# Altium PCB Bessel2.PcbDoc
Units mm, origin at the board's own origin, x right, y up, seen from the top; angles counter-clockwise.
Board outline 50.16 x 50.16 mm, 2 copper layers (Top Layer, Bottom Layer); 30 components, 19 nets, 80 pads, 0 vias.
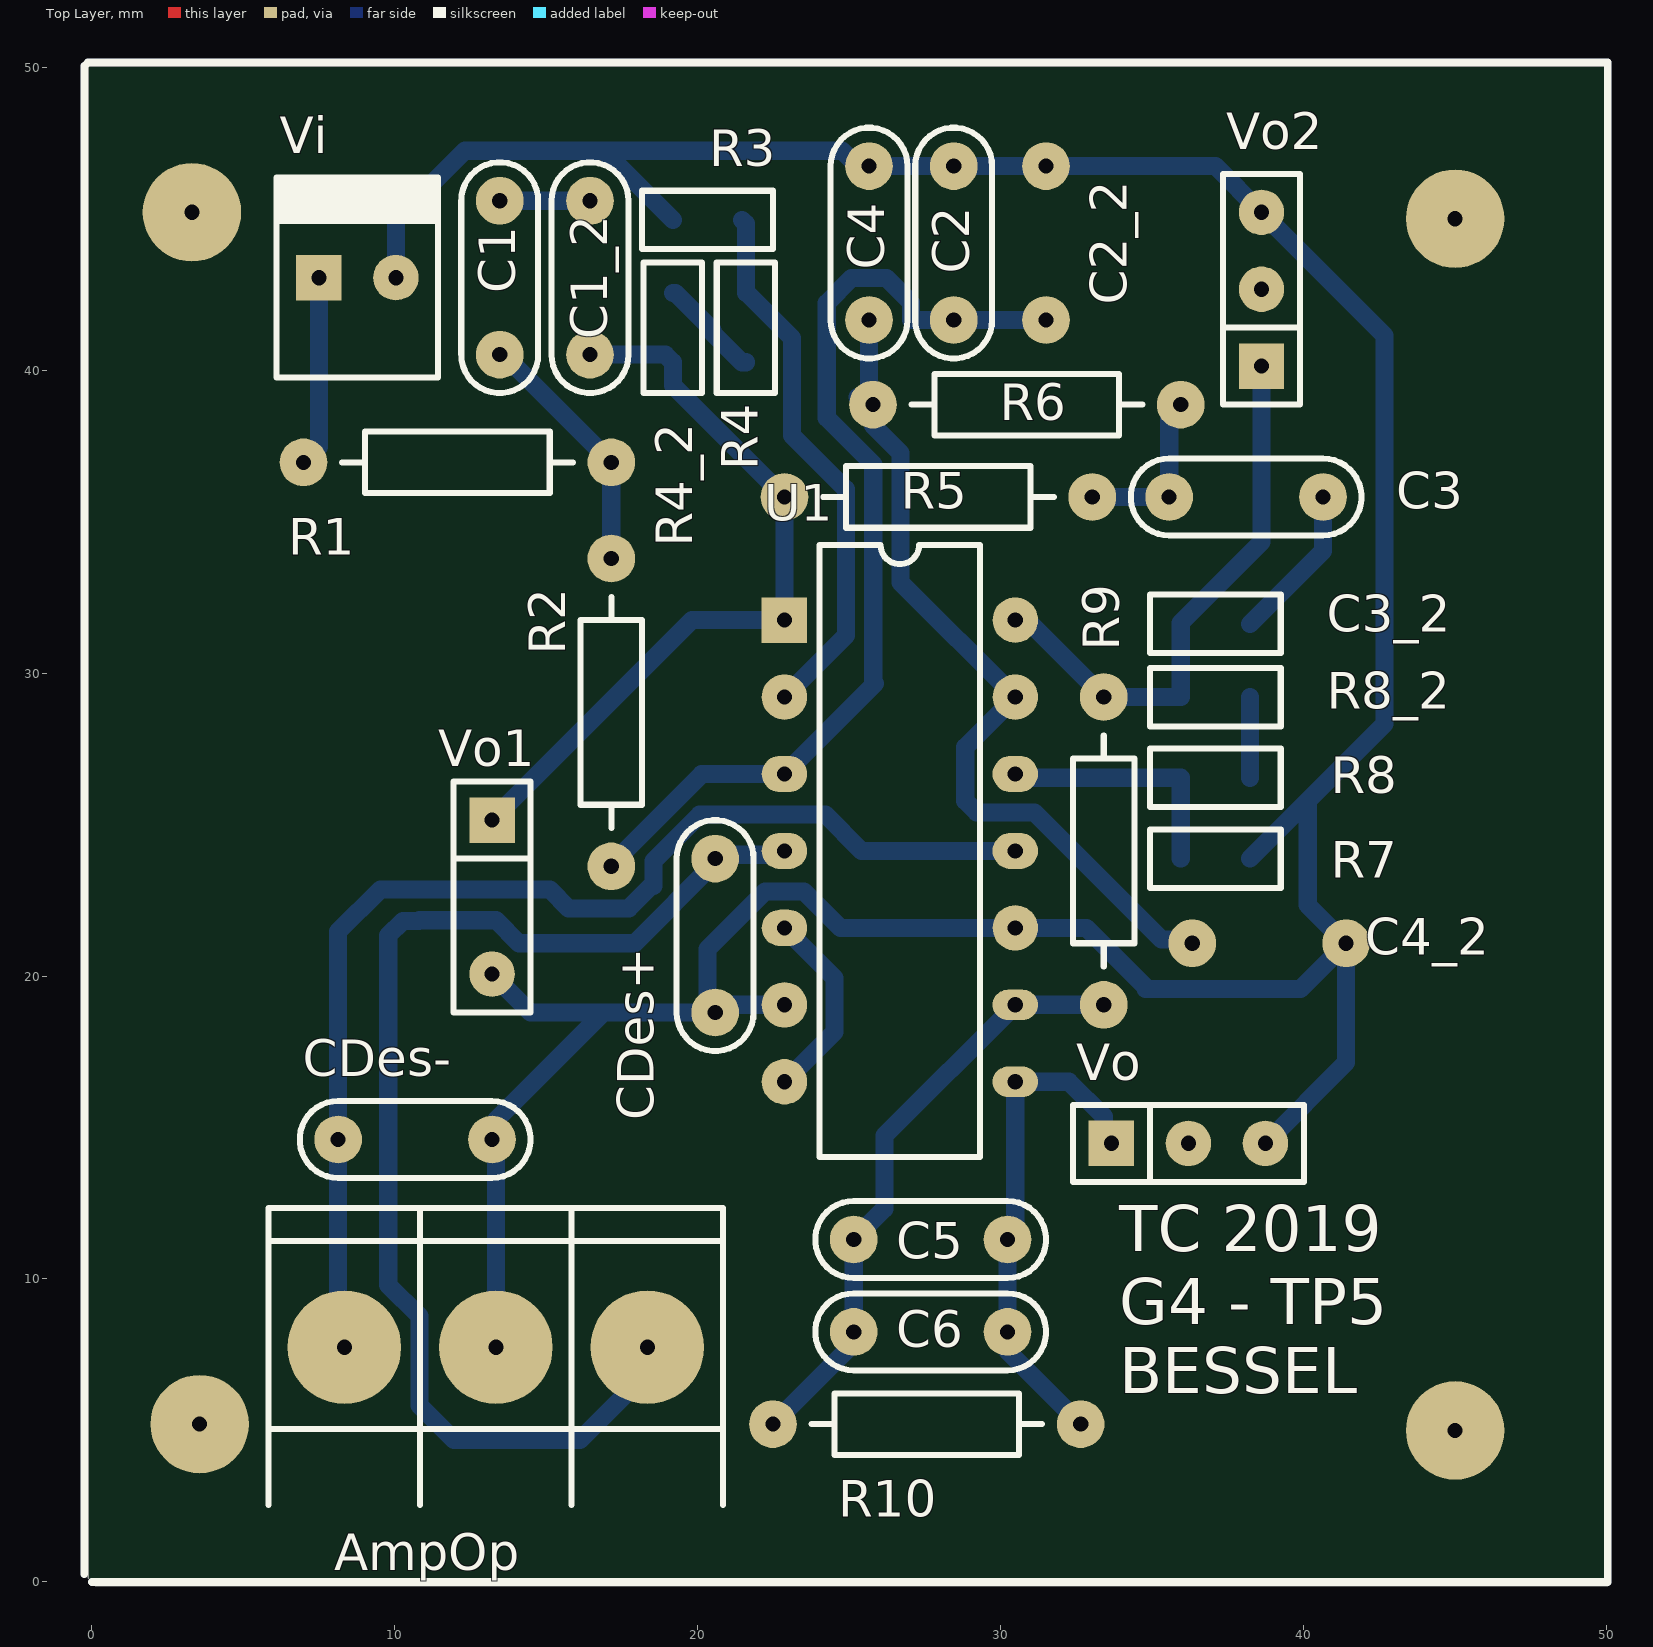
[diagram p0: Top Layer view]
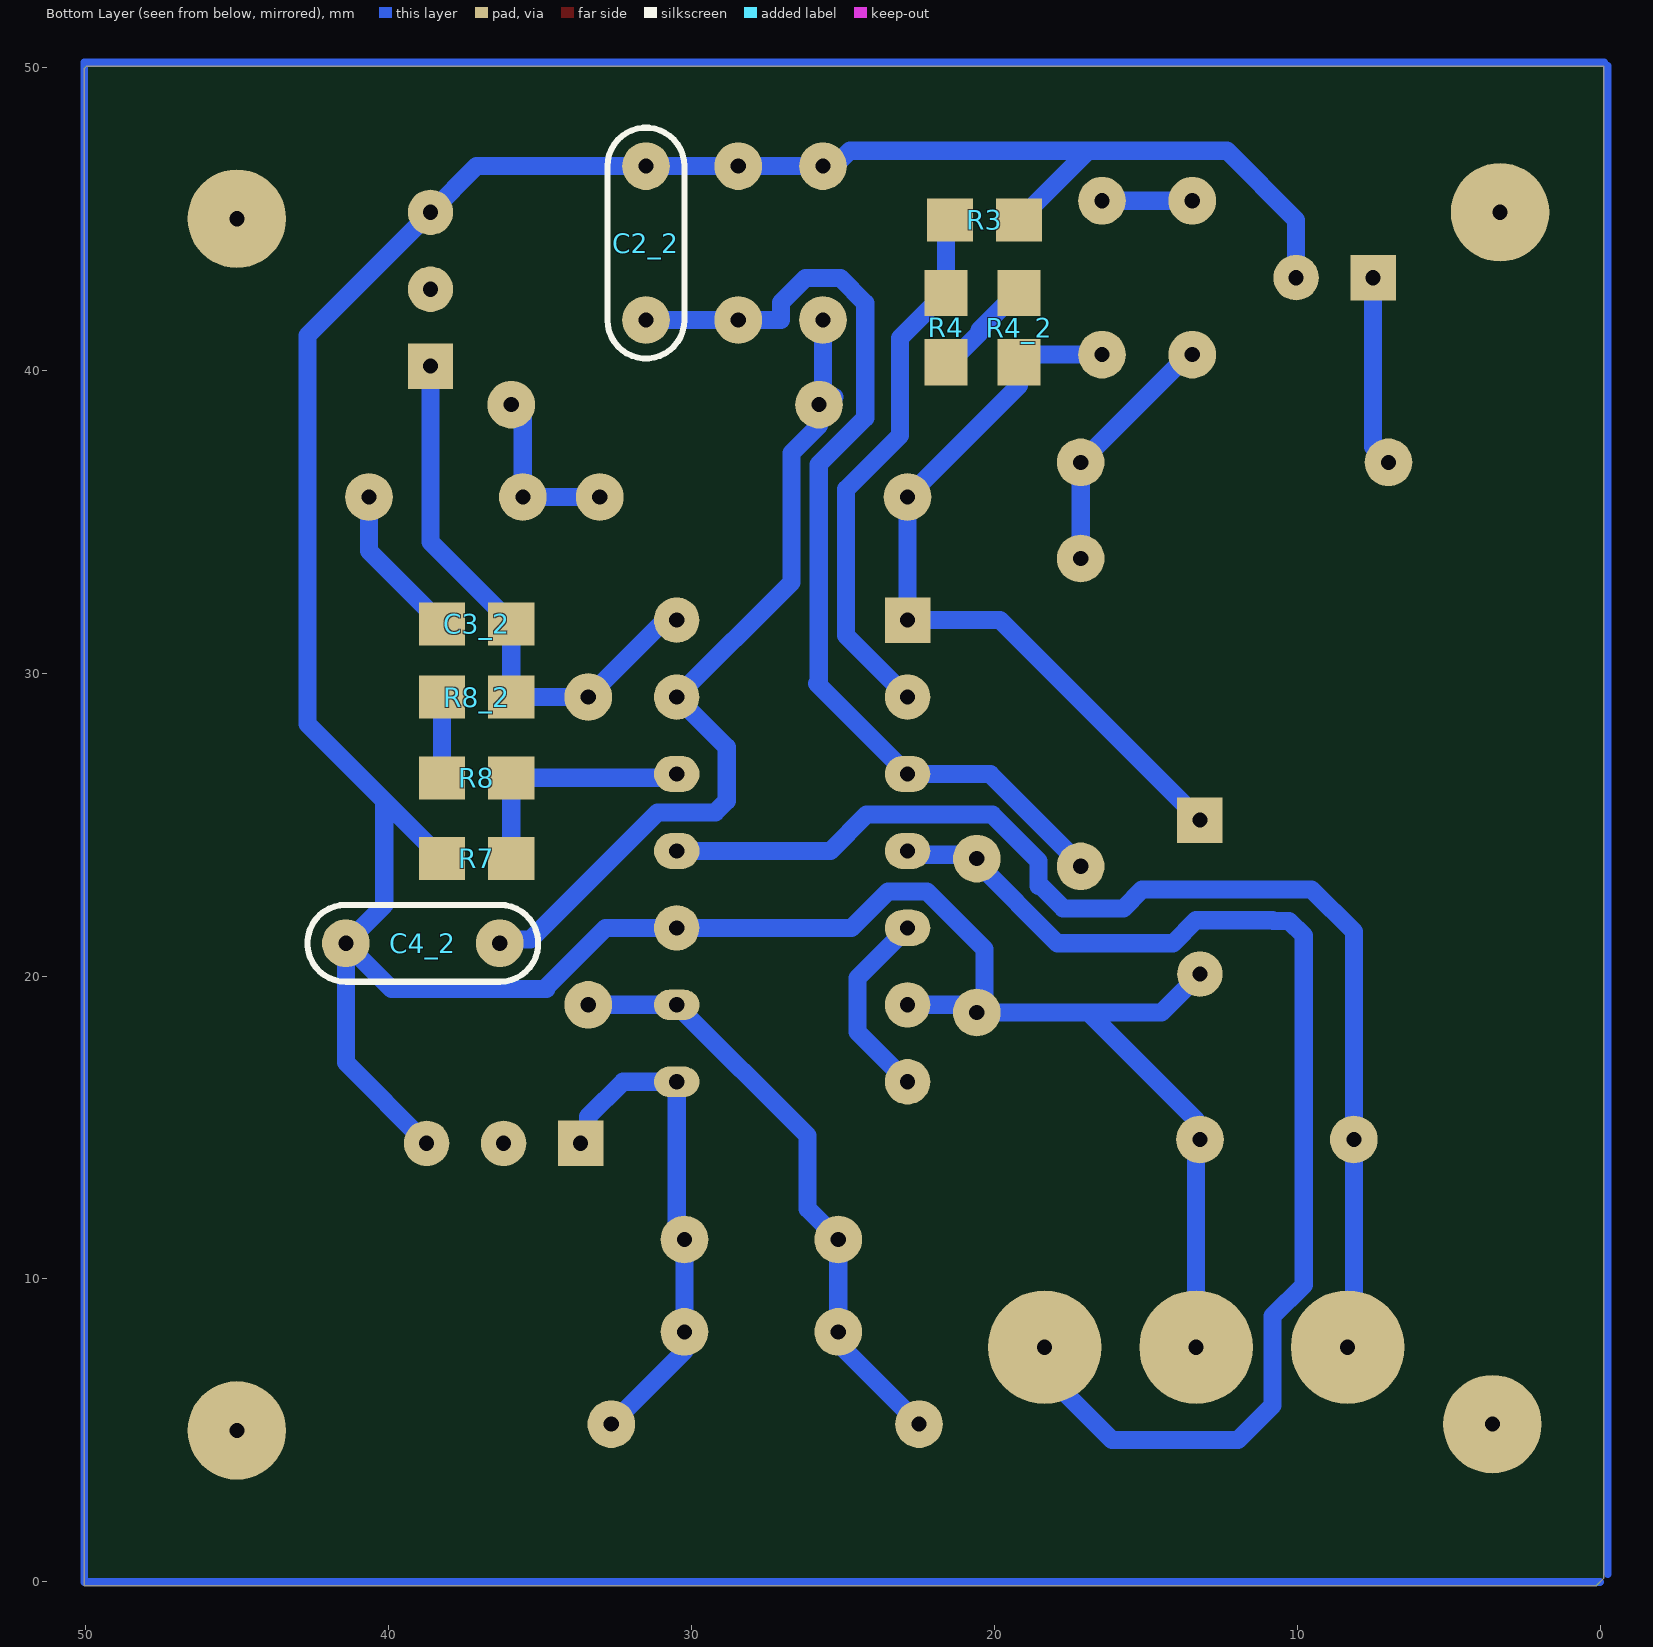
[diagram p1: Bottom Layer view, seen from below]
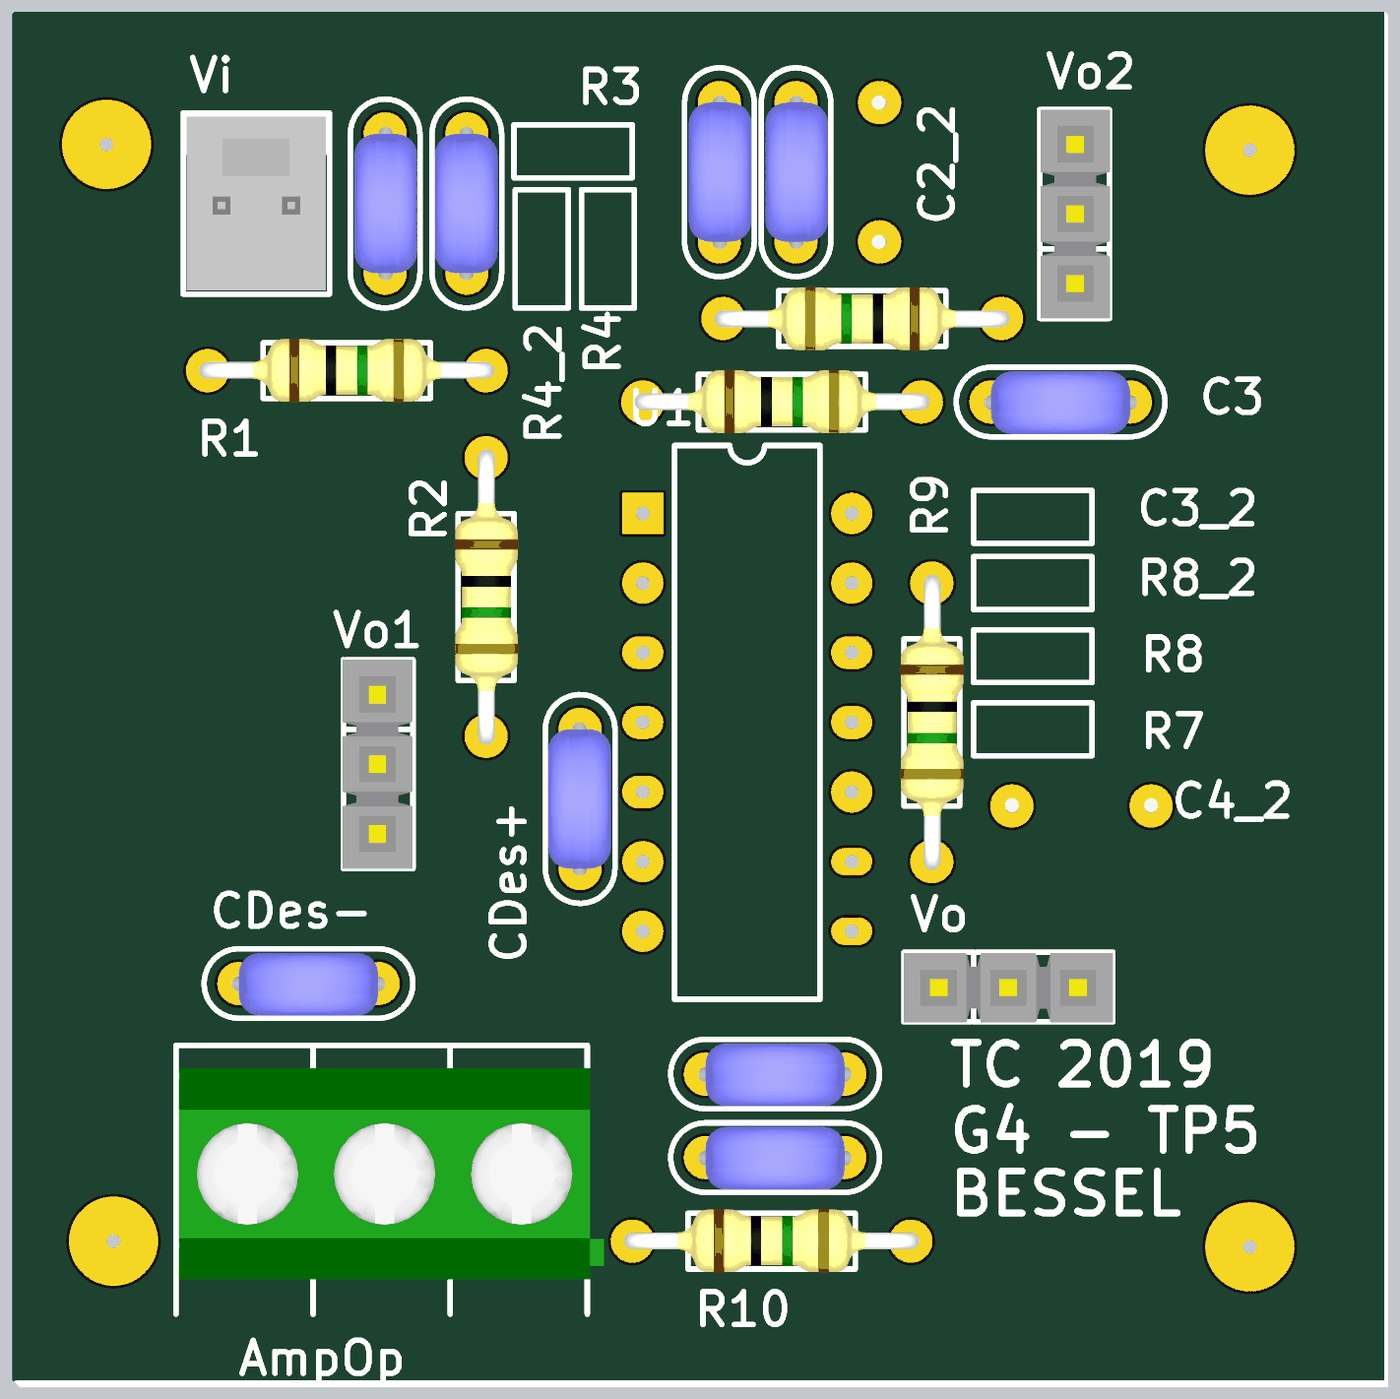
[diagram p2: 3D render of the assembled board from above, using the file's embedded part models]
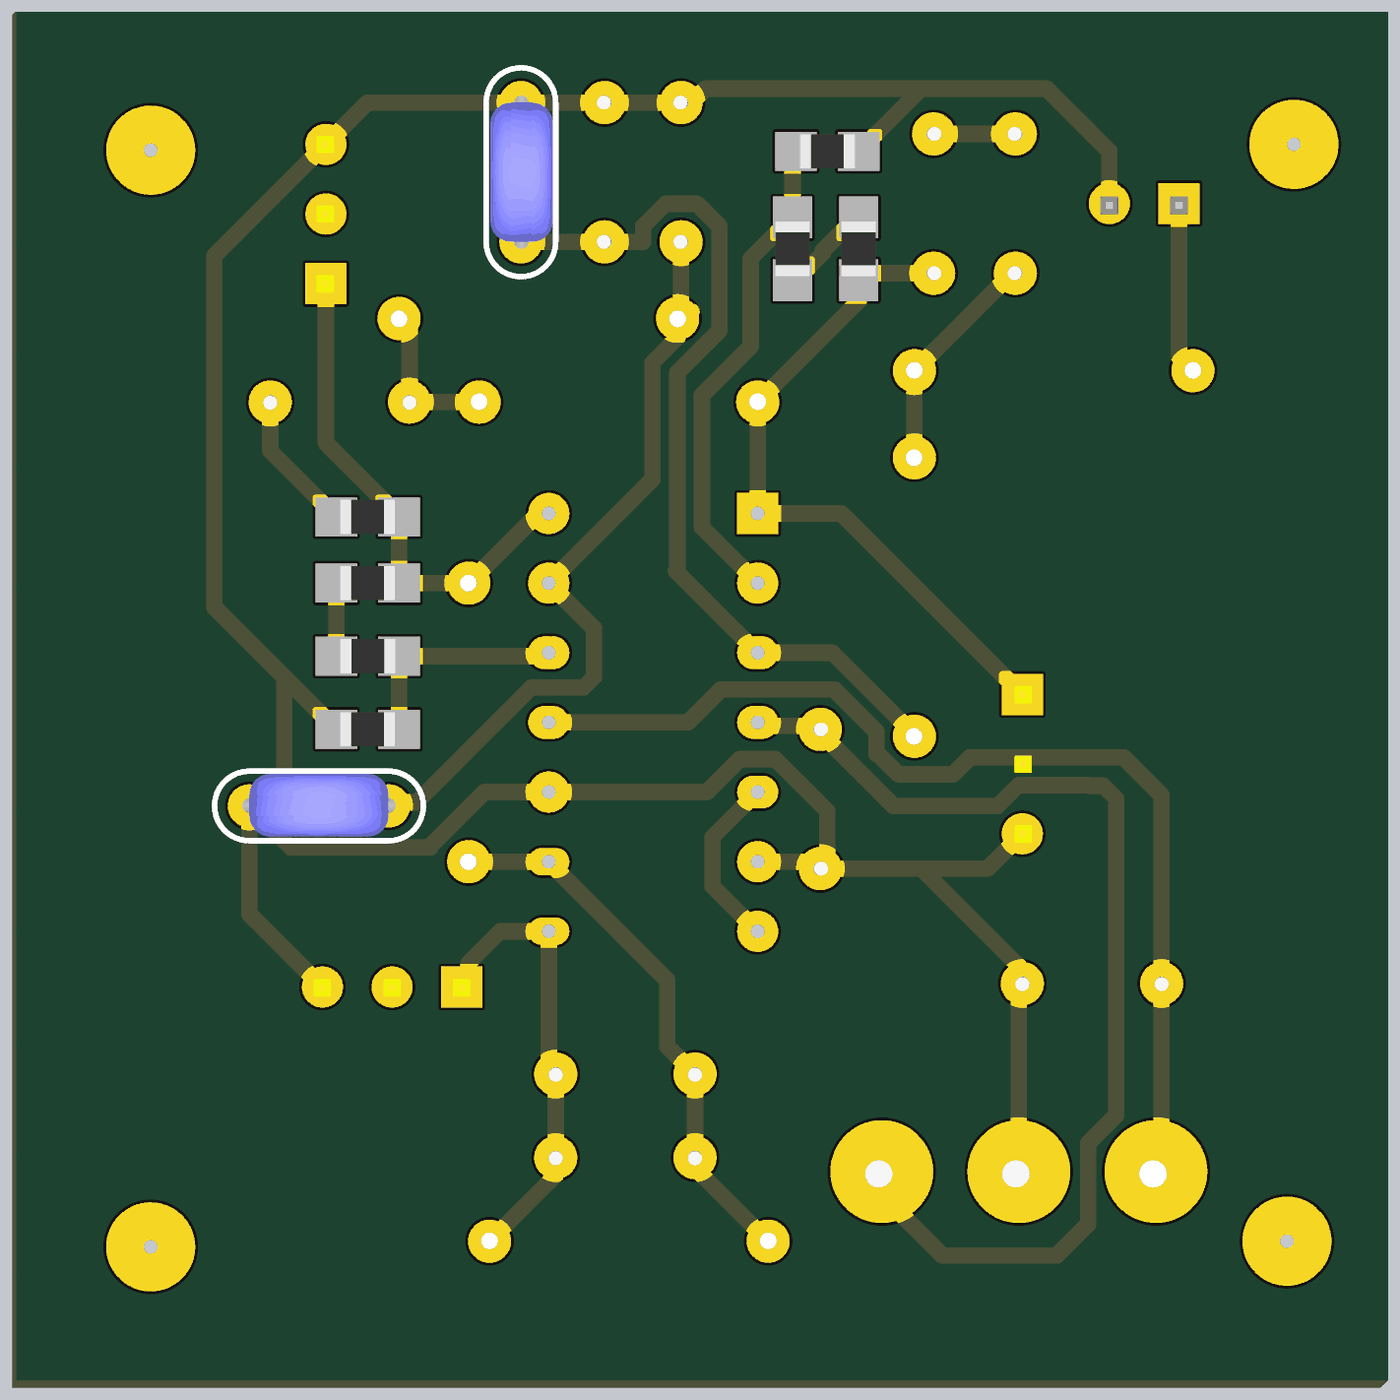
[diagram p3: 3D render of the assembled board from below, using the file's embedded part models]

## Layer stack, top to bottom
Top Solder: solder mask 0.0102, Solder Resist, Dk 3.5
Top Layer: signal copper 0.0356
Dielectric 1: dielectric 0.32, FR-4, Dk 4.8
Bottom Layer: signal copper 0.0356
Bottom Solder: solder mask 0.0102, Solder Resist, Dk 3.5

## Board outline
0.127,-0.127 50.038,-0.127 50.038,49.962 49.962,50.038 -0.127,50.038 -0.127,0.127

## Design rules (kind name [scope] priority, off if disabled: settings)
Clearance [All] p1: gap=0.3 ignorepadtopadclearanceinfootprint=FALSE
PolygonConnect [All] p1: connectstyle=Relief reliefconductorwidth=0.254 reliefentries=4 polygonreliefangle="90 Angle" airgapwidth=0.254
RoutingVias [All] p1: holewidth=0.711 width=1.27 viastyle="Through Hole" minholewidth=0.711 minwidth=1.27 maxholewidth=0.711 maxwidth=1.27
SolderMaskExpansion [All] p1: expansion=0.102
Width [All] p1: maxlimit=0.6 minlimit=0.6 preferedwidth=0.6
30 further rules are at their usual default settings.

## Components (designator, comment, footprint, x,y, rotation, side; value= is the part's Value field where it differs from the comment)
AmpOp "BORNERA 3" BORNERA3 13.335,7.747 r270 top
C1 "CAP" CAP200 13.462,43.053 r90 top
C1_2 "CAP" CAP200 16.442,43.053 r270 top
C2 "CAP" CAP200 28.448,44.196 r90 top
C2_2 "CAP" CAP200 31.496,44.196 r90 bottom
C3 "CAP" CAP200 38.1,35.814 r0 top
C3_2 "CAP" 0805 37.084,31.623 r180 bottom
C4 "CAP" CAP200 25.654,44.196 r90 top
C4_2 "CAP" CAP200 38.862,21.082 r0 bottom
C5 "CAP" CAP200 27.686,11.303 r0 top
C6 "CAP" CAP200 27.686,8.255 r0 top
CDes+ "100n" CAP200 20.574,21.336 r270 top
CDes- "100n" CAP200 10.668,14.605 r0 top
R1 "RES" RES400 6.985,36.957 r0 top
R2 "RES" RES400 17.145,33.782 r270 top
R3 "RES" 0805 20.32,44.958 r0 bottom
R4 "RES" 0805 21.59,41.402 r270 bottom
R4_2 "RES" 0805 19.177,41.402 r90 bottom
R5 "RES" RES400 22.86,35.814 r0 top
R6 "RES" RES400 35.941,38.862 r180 top
R7 "RES" 0805 37.084,23.876 r180 bottom
R8 "RES" 0805 37.084,26.543 r0 bottom
R8_2 "RES" 0805 37.084,29.21 r180 bottom
R9 "RES" RES400 33.401,29.21 r270 top
R10 "RES" RES400 22.479,5.207 r0 top
U1 "TL084J" J014 26.67,24.13 r270 top
Vi "MOLEX2" MOLEX2 7.493,43.053 r0 top
Vo "CON3" SIP3#1 36.195,14.478 r0 top
Vo1 "CON3" SIP3#2 13.208,22.606 r270 top
Vo2 "CON3" SIP3#1 38.608,42.672 r90 top

## Footprints (in the part's own frame and the unit in brackets; to place one, negate y for a bottom-side part, rotate by r counter-clockwise, add the part's x,y. Pads: shape width x height; smd on the part's side, far side on the other; paste and mask are expansions set on the pad)
0805 [mil] "Pasivo 0805"
  rect 60x56 smd: 1(-45,0) 2(45,0)
  body extent -39,-25 39,25, height 15
BORNERA3 [mm] "Bornera con Tornillos 5mm separación"
  round 3.75 hole 0.5: 1(0,5) 2(0,0) 3(0,-5)
  silkscreen extent -4.6,-7.5 5.2,7.5, body extent -3.76,-7.39 3.94,8.11, height 10.05
CAP200 [mil]
  round 62 hole 19.68: 1(-100,0) 2(100,0)
  silkscreen extent -150,-50 150,50, body extent -110,-46 110,44, height 246
J014 [mm] "DIP; 14 Leads; Row Spacing 7.62 mm; Pitch 2.54 mm"
  rect 1.5x1.5 hole 0.5: 1(-7.62,-3.81)
  round 1.5 hole 0.5: 2(-5.08,-3.81) 6(5.08,-3.81) 7(7.62,-3.81) 10(2.54,3.81) 13(-5.08,3.81) 14(-7.62,3.81)
  oval 1.2x1.5 hole 0.5: 3(-2.54,-3.81) 4(0,-3.81) 5(2.54,-3.81) 11(0,3.81) 12(-2.54,3.81)
  oval 1x1.5 hole 0.5: 8(7.62,3.81) 9(5.08,3.81)
  silkscreen extent -10.1,-2.65 10.1,2.65
MOLEX2 [mm]
  rect 1.5x1.5 hole 0.5: 1(0,0)
  round 1.5 hole 0.5: 2(2.54,0)
  silkscreen extent -1.4,-3.3 3.94,3.3, body extent -1.27,-3.17 3.81,3.17, height 10.74
RES400 [mil]
  round 62 hole 19.68: 1(0,0) 2(400,0)
  silkscreen extent 50,-40 350,40, body extent -12,-45 412,46, height 96
SIP3#1 [mm]
  rect 1.5x1.5 hole 0.5: 1(-2.54,0)
  round 1.5 hole 0.5: 2(0,0) 3(2.54,0)
  silkscreen extent -3.81,-1.27 3.81,1.27, body extent -3.81,-1.3 3.81,1.24, height 8.38
SIP3#2 [mm]
  rect 1.5x1.5 hole 0.5: 1(-2.54,0)
  round 0.01 smd: 2(0,0)
  round 1.5 hole 0.5: 3(2.54,0)
  silkscreen extent -3.81,-1.27 3.81,1.27, body extent -3.81,-1.3 3.81,1.24, height 8.38

## Part data
CDes+ CDes-: library part CAP
U1: "JFET-Input Operational Amplifier", ComponentLink1Description="Manufacturer Link", ComponentLink1URL=http://www.ti.com/, ComponentLink2Description=Datasheet, ComponentLink2URL=http://www-s.ti.com/sc/ds/tl084.pdf, DatasheetVersion=Feb-1999, LatestRevisionDate=04-Mar-2005, LatestRevisionNote="Stylized 3D Model Added.", PackageDescription="DIP; 14 Leads; Row Spacing 7.62 mm; Pitch 2.54 mm", PackageReference=J014, PackageVersion=Jun-1999, Published=16-Jan-2001, Publisher="Altium Limited"

## Free pads (board coordinates)
  round 3.25 hole 0.5: 2(3.302,45.212) 2(3.556,5.207) 2(45,5) 2(45,45)

## Nets (pads, with @x,y where several pads share a name; then routed paths per layer and width w, separated by ;. In a path a pad name is that pad's centre, name@x,y a point inside that pad or via, vN(x,y) a via of type N, cw(c..) or ccw(c..) an arc to the next point about the centre after c; other vN are vias at no path point)
GND: AmpOp.2 C2.2 C2_2.2 C4.2 C4_2.2 CDes+.2 CDes-.2 R3.1 R7.1 U1.6 U1.10 Vi.2 Vo1.3 Vo2.3 Vo.3 | length 121.9
  Bottom Layer w0.6: Vi.2 10.033,44.958 12.319,47.244 16.891,47.244 ; Vo1.3 14.478,18.796 16.891,18.796 ; AmpOp.2 13.335,15.24 16.891,18.796 ; R3.1 16.891,47.244 ; U1.6 20.447,19.05 CDes+.2@20.32,18.923 ; R7.1 40.132,25.781 ; Vo.3 41.402,17.145 C4_2.2 ; 16.891,18.796 20.193,18.796 CDes+.2@20.32,18.923 ; 16.891,47.244 24.765,47.244 25.273,46.736 C4.2 C2.2 C2_2.2 37.084,46.736 Vo2.3 42.672,41.148 42.672,28.321 40.132,25.781 ; CDes+.2@20.32,18.923 20.32,20.897 22.213,22.79 23.507,22.79 24.707,21.59 U1.10 32.823,21.59 34.788,19.625 34.788,19.568 39.888,19.568 C4_2.2 ; 40.132,25.781 40.132,22.352 C4_2.2
NetC1_1: C1.1 R1.2 R2.1 | length 7.9
  Bottom Layer w0.6: C1.1 13.589,40.513 R1.2 R2.1@17.145,34.163
NetC1_2: C1.2 C1_2.1 | length 3
  Bottom Layer w0.6: C1.2 C1_2.1
NetC2_1: C2.1 C2_2.1 R2.2 U1.3 | length 32.9
  Bottom Layer w0.6: R2.2 17.145,23.682 20.133,26.67 U1.3 25.845,29.654 25.792,29.707 25.792,36.889 24.257,38.424 24.257,42.221 25.079,43.043 26.229,43.043 27.041,42.231 27.041,41.656 C2.1 C2_2.1
NetC3_1: C3.1 R5.2 R6.1 | length 5.7
  Bottom Layer w0.6: R5.2 C3.1 R6.1@35.56,38.989
NetC3_2: C3.2 C3_2.1 | length 5.2
  Bottom Layer w0.6: C3_2.1 40.64,34.036 C3.2
NetC4_1: C4.1 C4_2.1 R6.2 U1.13 | length 27.7
  Bottom Layer w0.6: R6.2@25.273,39.116 R6.2@25.4,38.989 ; C4.1 25.654,38.989 R6.2 25.781,38.173 26.692,37.262 26.692,32.998 U1.13 28.829,27.559 28.829,25.781 29.21,25.4 31.115,25.4 35.306,21.209 C4_2.1@35.941,21.209
NetC5_1: C5.1 C6.1 R9.2 R10.1 U1.9 | length 20.1
  Bottom Layer w0.6: R10.1 25.146,7.874 C6.1 C5.1 26.162,12.319 26.162,14.732 U1.9 R9.2
NetR3_2: R3.2 R4.1 U1.2 | length 18
  Bottom Layer w0.6: R3.2 21.59,44.831 R4.1 21.626,42.545 23.114,41.057 23.114,37.846 24.892,36.068 24.892,31.242 U1.2
NetR4_2: R4.2 R4_2.2 | length 3.4
  Bottom Layer w0.6: R4_2.2 19.268,42.545 20.488,41.325 20.488,41.234 21.463,40.259 R4.2
NetR7_2: R7.2 R8.1 U1.12 | length 8.2
  Bottom Layer w0.6: U1.12 30.607,26.543 R8.1 R7.2
NetR8_2: R8.2 R8_2.1 | length 2.7
  Bottom Layer w0.6: R8.2 R8_2.1
NetU1_5: U1.5 U1.7 | length 6.4
  Bottom Layer w0.6: U1.7 24.511,18.161 24.511,19.939 U1.5
V+: AmpOp.1 CDes+.1 U1.4 | length 40.8
  Bottom Layer w0.6: AmpOp.1 18.335,6.905 16.114,4.684 11.953,4.684 10.81,5.827 10.81,8.772 9.779,9.803 9.779,21.336 10.265,21.822 10.795,21.822 10.817,21.844 13.339,21.844 14.101,21.082 17.91,21.082 20.574,23.746 CDes+.1 ; CDes+.1@20.32,24.003 22.733,24.003 U1.4
V-: AmpOp.3 CDes-.1 U1.11 | length 39.3
  Bottom Layer w0.6: AmpOp.3 8.128,7.954 CDes-.1 8.128,21.463 9.525,22.86 15.113,22.86 15.738,22.235 17.72,22.235 18.462,22.977 18.532,22.977 18.532,23.796 20.066,25.33 24.21,25.33 25.41,24.13 U1.11
Vin: R1.1 Vi.1 | length 6.3
  Bottom Layer w0.6: R1.1 7.493,37.465 Vi.1
Vo: C5.2 C6.2 R10.2 U1.8 Vo.1 | length 16.8
  Bottom Layer w0.6: R10.2 30.226,7.62 C6.2 C5.2 30.48,11.557 U1.8 32.258,16.51 33.401,15.367 33.401,14.732 Vo.1
Vo1: C1_2.2 R4_2.1 R5.1 U1.1 Vo1.1 | length 25.3
  Bottom Layer w0.6: Vo1.1 19.812,31.75 U1.1 R5.1 19.177,39.497 R4_2.1 18.923,40.513 C1_2.2
Vo2: C3_2.2 R8_2.2 R9.1 U1.14 Vo2.1 | length 18.5
  Bottom Layer w0.6: U1.14 30.861,31.75 R9.1 R8_2.2 C3_2.2 35.941,31.659 38.608,34.326 Vo2.1
pads on no net: Vo1.2 Vo2.2 Vo.2
copper on no net: | length 200.2
  Bottom Layer w0.254: -0.254,0.254 -0.254,50.038 ; -0.127,50.165 50.038,50.165 50.038,0 0,0

## Silkscreen, mask and mechanical layers (free items; w line width, h text height)
Top Overlay:
  lines w0.254: -0.254,0.254 -0.254,50.038 -0.127,50.165 50.038,50.165 50.038,0 0,0
  text "TC 2019" at 33.909,10.922 h1.52
  text "G4 - TP5" at 33.909,8.509 h1.52
  text "BESSEL" at 33.909,6.223 h1.52